# Altium PCB bai 1.PcbDoc
Units mil, origin at the board's own origin, x right, y up, seen from the top; angles counter-clockwise.
Board outline 5775.03 x 2610.03 mil, 2 copper layers (Top Layer, Bottom Layer); 8 components, 8 nets, 21 pads, 0 vias.
Unrouted connection lines stored in the file: 2.
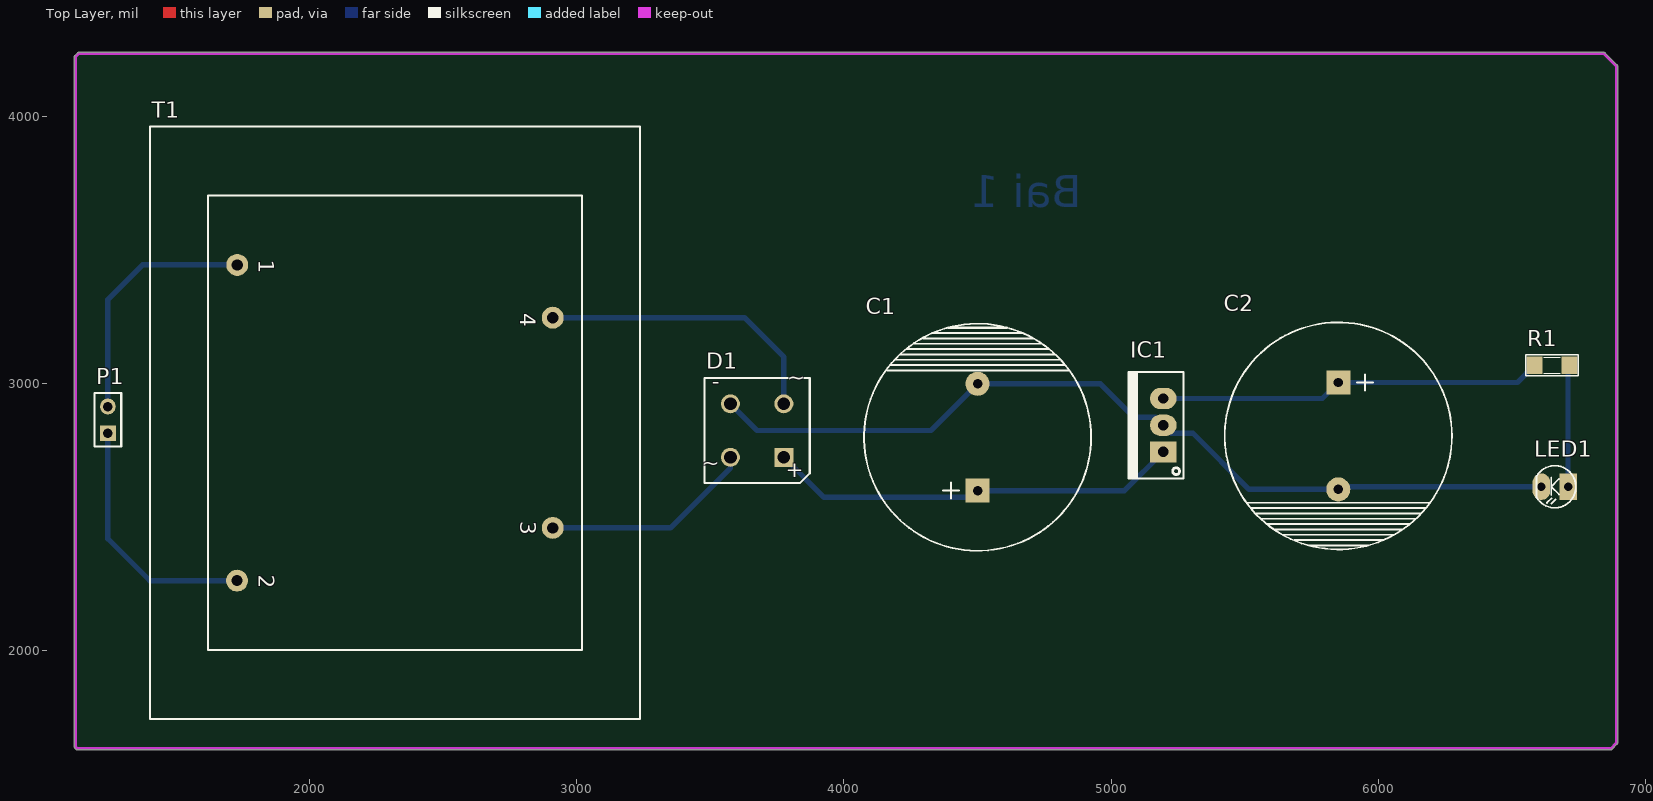
[diagram p0: Top Layer view]
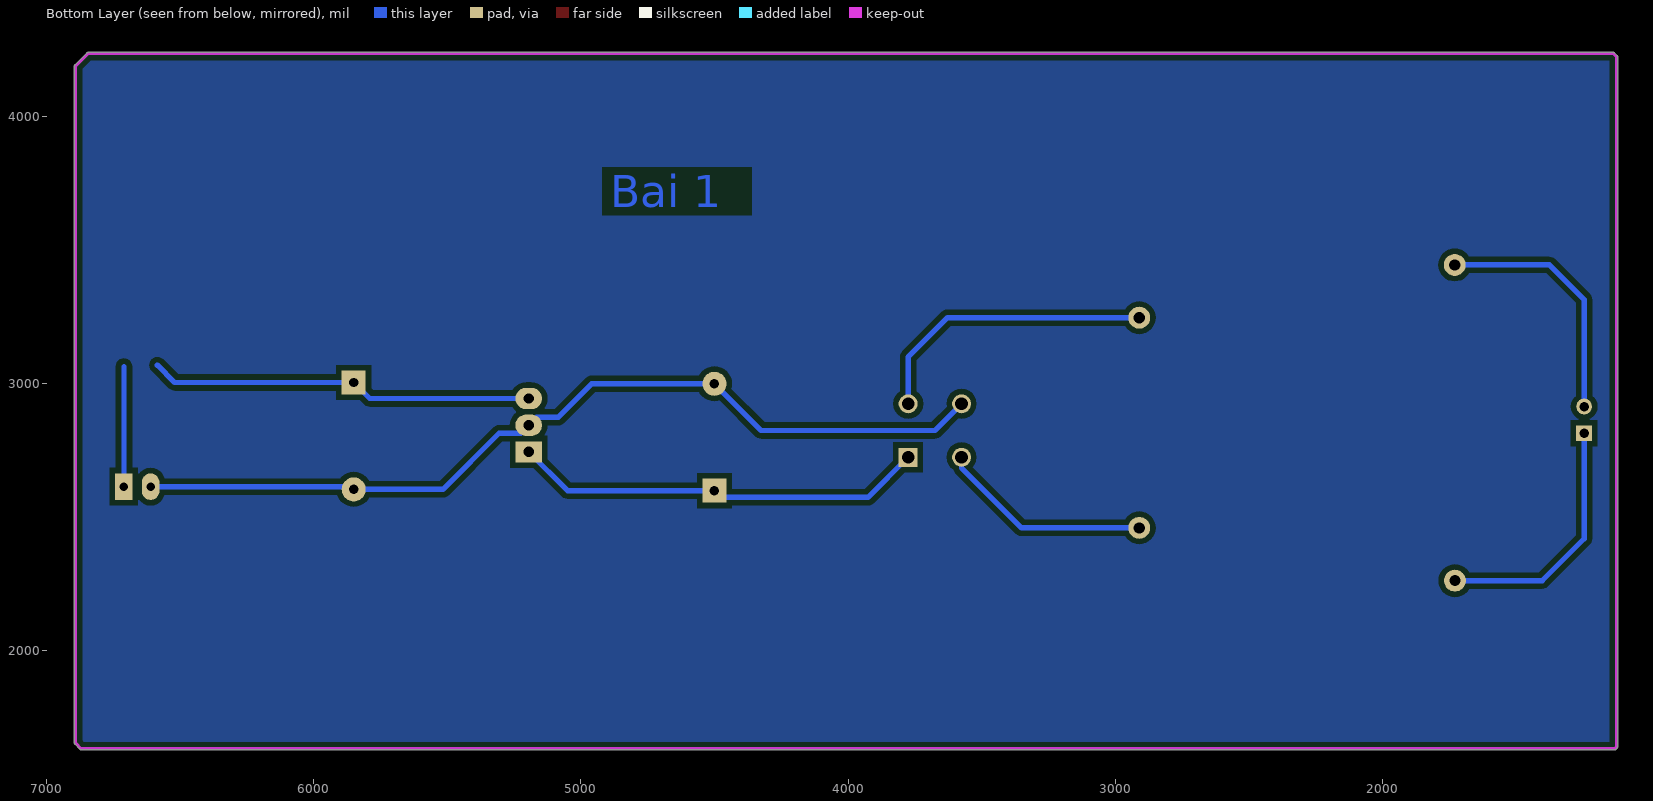
[diagram p1: Bottom Layer view, seen from below]
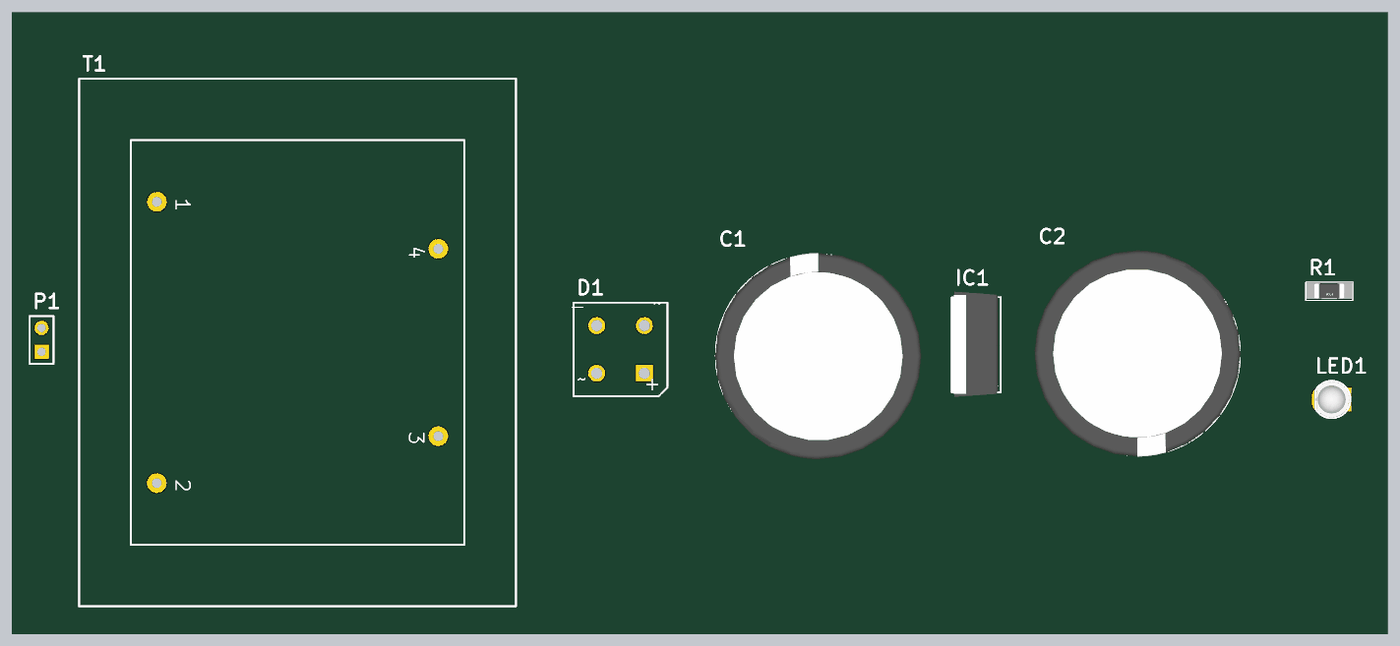
[diagram p2: 3D render of the assembled board from above, using the file's embedded part models]

## Layer stack, top to bottom
Top Solder: solder mask 0.4, Solder Resist, Dk 3.5
Top Layer: signal copper 1.4
Dielectric 1: dielectric 12.6, FR-4, Dk 4.8
Bottom Layer: signal copper 1.4
Bottom Solder: solder mask 0.4, Solder Resist, Dk 3.5

## Board outline
1126.45,1631.45 1121.45,1636.45 1121.47,1636.44 cw(c1125,1640) 1119.98,1640 1119.98,4225 cw(c1125,4225) 1121.47,4228.56 1121.45,4228.55 1131.45,4238.55 1131.44,4238.53 cw(c1135,4235) 1135,4240.02 6845,4240.02 cw(c6845,4235) 6848.56,4238.53 6848.55,4238.55 6893.55,4193.55 6893.53,4193.56 cw(c6890,4190) 6895.02,4190 6895.02,1655 cw(c6890,1655) 6893.53,1651.44 6893.55,1651.45 6873.55,1631.45 6873.56,1631.47 cw(c6870,1635) 6870,1629.98 1130,1629.98 cw(c1130,1635)

## Design rules (kind name [scope] priority, off if disabled: settings)
Clearance [All] p1: gap=20 ignorepadtopadclearanceinfootprint=FALSE
PolygonConnect [All] p1: connectstyle=Relief reliefconductorwidth=10 reliefentries=4 polygonreliefangle="90 Angle" airgapwidth=10
RoomDefinition "bai 1" [InComponentClass('bai 1')] p1: confinementstyle=ConfineIn formatcopy=TRUE lockcomponents=FALSE outline 8300,1045 13280,1045 13280,3385 8300,3385
RoutingLayers [All] p1: top layer_v5=FALSE bottom layer_v5=TRUE
RoutingVias [All] p1: holewidth=28 width=50 viastyle="Through Hole" minholewidth=28 minwidth=50 maxholewidth=28 maxwidth=50
SolderMaskExpansion [All] p1: expansion=4
Width [All] p1: maxlimit=30 minlimit=15 preferedwidth=20
29 further rules are at their usual default settings.

## Components (designator, comment, footprint, x,y, rotation, side; value= is the part's Value field where it differs from the comment)
C1 "1000uF/35V" CP4/8.5 4500,2600 r90 top value=4700uF/50V
C2 "470uF/16V" CP4/8.5 5850,3005 r270 top value=4700uF/50V
D1 "Bridge1" D-38 3675,2825 r180 top
IC1 "LM7805" QTO-220 5195,2745 r90 top
LED1 "LED" LED-3 6710,2615 r180 top value="LED 3 ly Single Colour"
P1 "Header 2" HDR1X2 1245,2815 r90 top
R1 "1k" SM-RES-1206 6715,3070 r180 top value="R1/4W - 1K"
T1 "Trans Cupl" TRF_4 2319.17,2854.17 r270 top

## Footprints (in the part's own frame and the unit in brackets; to place one, negate y for a bottom-side part, rotate by r counter-clockwise, add the part's x,y. Pads: shape width x height; smd on the part's side, far side on the other; paste and mask are expansions set on the pad)
CP4/8.5 [mil] "Tu hoa 4700uF/50V"
  rect 90x90 hole 35: 1(0,0)
  round 90 hole 35: 2(400,0)
  silkscreen extent -225,-425 625,425, body extent -236,-438 630,428, height 984
D-38 [mm] "Bridge Rectifier; 4 Terminals; Body 9.4 x 9.4 mm (typ); Pitch 5.08 mm"
  rect 1.8x1.8 hole 1.2: 1(-2.54,2.54)
  round 1.8 hole 1.2: 2(-2.54,-2.54) 3(2.54,-2.54) 4(2.54,2.54)
  silkscreen extent -5,-5 5,5, body extent -5,-5 5,5, height 9.91
HDR1X2 [mm] "Connector; Header; 2 Position"
  rect 1.5x1.5 hole 0.9: 1(0,0)
  round 1.5 hole 0.9: 2(2.54,0)
  silkscreen extent -1.27,-1.27 3.81,1.27
LED-3 [mil] "LED 2 PIN, 3ly Only colour"
  rect 65x100 hole 32: 1(0,0)
  oval 65x100 hole 32: 2(100,0)
  silkscreen extent -29,-78 118,79, body extent -25,-75 113,75, height 217
QTO-220 [mil] "TO-220 - 1-2-3"
  rect 80x100 hole 39: 1(0,0)
  oval 80x100 hole 39: 2(100,0) 3(200,0)
  silkscreen extent -100,-76 300,130, body extent -119,-64 322,121, height 755
SM-RES-1206 [mil]
  rect 60x65 smd: 1(0,0) 2(130,0)
  silkscreen extent -34,-38 164,39, body extent 2,-31 128,32, height 40
TRF_4 [mil] "Transformer; 4 Leads"
  round 82 hole 42: 1(-590.83,-590) 2(590.83,-590.83) 3(393.33,590.83) 4(-393.33,590.83)
  silkscreen extent -1108,-917 1108,917

## Part data
C1 C2: library part CP7, "Cap 4700uF/50V"
D1: "Full Wave Diode Bridge", DatasheetVersion=E2732B, LatestRevisionDate=29-May-2009, LatestRevisionNote="Sch pins A & K swapped.", PackageDescription="Bridge Rectifier; 4 Terminals; Body 9.4 x 9.4 mm (typ); Pitch 5.08 mm", PackageReference=D-38, Published=8-Jun-2000, Publisher="Altium Limited"
IC1: library part LM78xx, "On ap +, from + 5 to + 24VDC", =LM7808
LED1: "LED Single colour Green and Red"
P1: "Header, 2-Pin", LatestRevisionDate=17-Jul-2002, LatestRevisionNote="Re-released for DXP Platform.", Publisher="Altium Limited"
R1: library part R, "Resistor 1/4W"
T1: "Transformer (Coupled Inductor Model)", LatestRevisionDate=17-Jul-2002, LatestRevisionNote="Re-released for DXP Platform.", PackageDescription="Transformer; 4 Leads", PackageReference=TRF_4, Published=8-Jun-2000, Publisher="Altium Limited"

## Nets (pads, with @x,y where several pads share a name; then routed paths per layer and width w, separated by ;. In a path a pad name is that pad's centre, name@x,y a point inside that pad or via, vN(x,y) a via of type N, cw(c..) or ccw(c..) an arc to the next point about the centre after c; other vN are vias at no path point)
GND: C1.2 C2.2 D1.3 IC1.2 LED1.2 | length 3316.7
  Bottom Layer w20: D1.3 3675,2825 4325,2825 C1.2 4959.29,3000 5084.29,2875 5165,2875 IC1.2 5225,2815 5305.71,2815 5515.71,2605 C2.2 5860,2615 LED1.2
NetC1_1: C1.1 D1.1 IC1.1 | length 1552.5
  Bottom Layer w20: D1.1 3925,2575 4475,2575 C1.1 5050,2600 IC1.1
NetD1_2: D1.2 T1.4 | length 1101.1
  Bottom Layer w20: T1.4 3627.5,3247.5 3775,3100 D1.2
NetD1_4: D1.4 T1.3 | length 797.9
  Bottom Layer w20: T1.3 3350.83,2460.83 3575,2685 D1.4
NetLED1_1: LED1.1 R1.1 | length 471.2
  Top Layer w20: LED1.1 LED1.1@6715,2620
  Bottom Layer w20: 6710,3065 LED1.1 LED1.1@6720,2625
NetP1_1: P1.1 T1.2 | length 943.2
  Bottom Layer w20: P1.1 1245,2420 1401.67,2263.33 T1.2
NetP1_2: P1.2 T1.1 | length 938
  Bottom Layer w20: P1.2 1245,3315 1375,3445 T1.1
VCC: C2.1 IC1.3 R1.2 | length 1441.8
  Bottom Layer w20: IC1.3 5790,2945 C2.1 6520,3005 6585,3070

## Polygon pours and split planes (outlines as drawn)
no net on Bottom Layer (solid, pour order 0): 1130,4230 1135,4235 6845,4235 6890,4190 6890,1655 6870,1635 6865,1640 1125,1640

## Keep-outs
Keep-Out Layer:
  lines w10: 1125,4045 1125,4225 1135,4235 6845,4235 6890,4190 6890,1655 6870,1635 1130,1635 1125,1640 1125,4070

## Other copper
Bottom Layer:
  text "Bai 1" at 4890,3660 h120

## Text inside footprints (layer, text, board x,y; h text height)
D1: Top Overlay "+" at 3848.62,2700.43 h59.06 r180; Top Overlay "-" at 3535,3025 h59.05 r180; Top Overlay "~" at 3855,3045 h59.05 r180; Top Overlay "~" at 3535,2725 h59.05 r180
T1: Top Overlay "1" at 1809.17,3465 h59.06 r270; Top Overlay "2" at 1809.17,2285 h59.06 r270; Top Overlay "4" at 2789.17,3265 h59.06 r270; Top Overlay "3" at 2789.17,2485 h59.06 r270